# Altium PCB CustomTP4056Module.PcbDoc
Units mm, origin at the board's own origin, x right, y up, seen from the top; angles counter-clockwise.
Board outline 40.01 x 26.67 mm, 2 copper layers (Top Layer, Bottom Layer); 13 components, 10 nets, 36 pads, 0 vias.
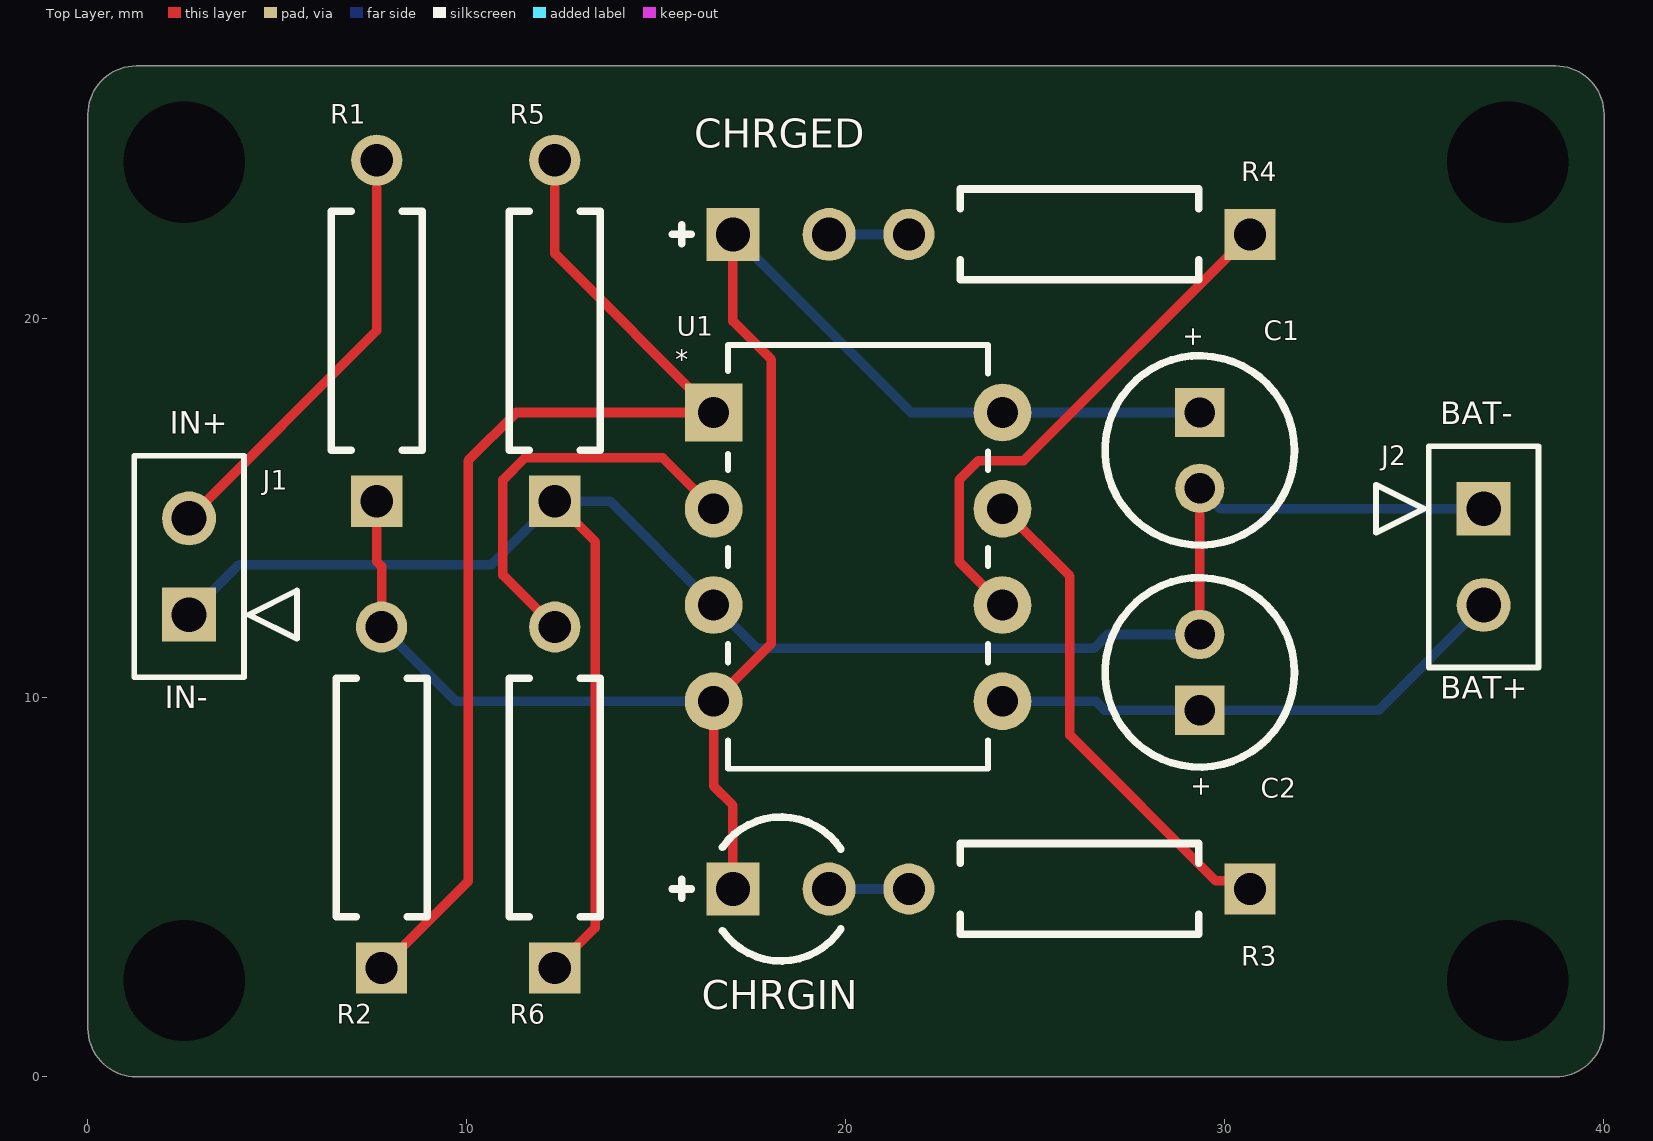
[diagram p0: Top Layer view]
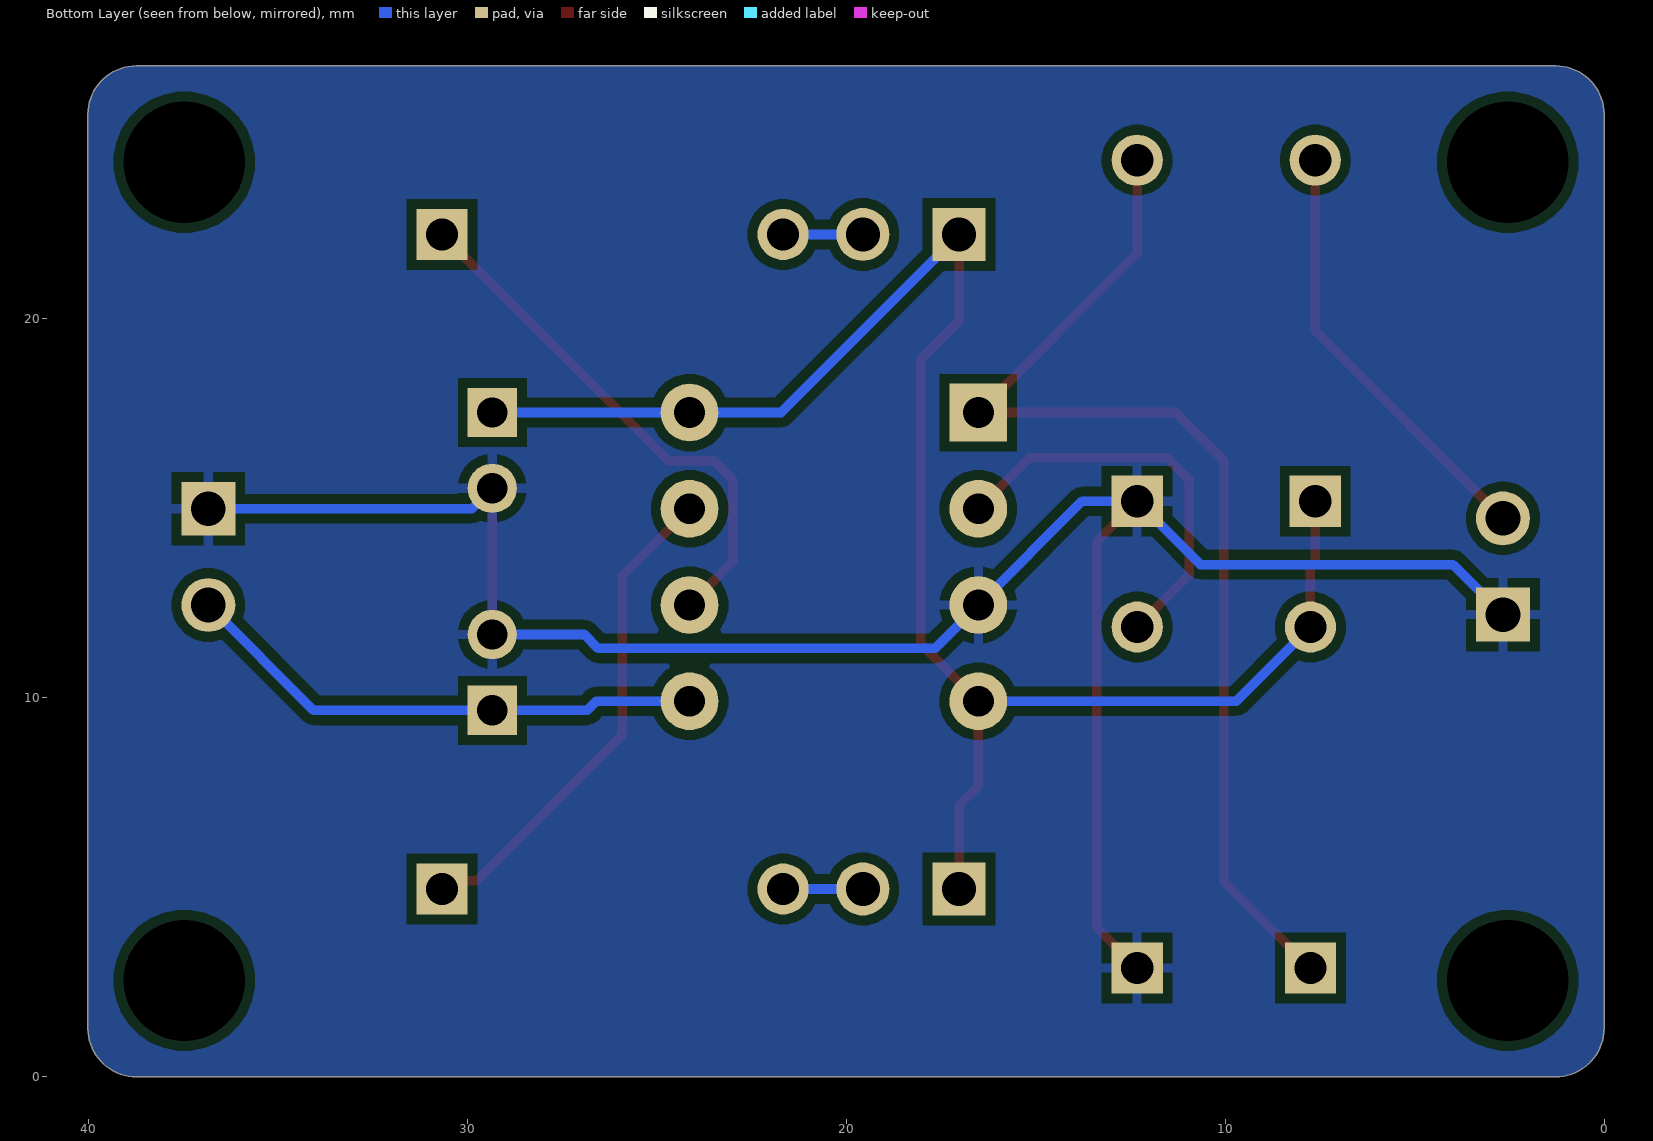
[diagram p1: Bottom Layer view, seen from below]

## Layer stack, top to bottom
Top Solder: solder mask 0.0102, Solder Resist, Dk 3.5
Top Layer: signal copper 0.0356
Dielectric 1: dielectric 0.32, FR-4, Dk 4.8
Bottom Layer: signal copper 0.0356
Bottom Solder: solder mask 0.0102, Solder Resist, Dk 3.5

## Board outline
0,1.27 0,25.4 cw(c1.27,25.4) 1.27,26.67 38.735,26.67 cw(c38.735,25.4) 40.005,25.4 40.005,1.27 cw(c38.735,1.27) 38.735,0 1.27,0 cw(c1.27,1.27)

## Design rules (kind name [scope] priority, off if disabled: settings)
Clearance [All] p1: gap=0.254 ignorepadtopadclearanceinfootprint=FALSE
PolygonConnect [All] p1: connectstyle=Relief reliefconductorwidth=0.254 reliefentries=4 polygonreliefangle="90 Angle" airgapwidth=0.254
RoutingVias [All] p1: holewidth=0.711 width=1.27 viastyle="Through Hole" minholewidth=0.711 minwidth=1.27 maxholewidth=0.711 maxwidth=1.27
SolderMaskExpansion [All] p1: expansion=0.102 istentingtop=FALSE
Width [All] p1: maxlimit=0.254 minlimit=0.254 preferedwidth=0.254
30 further rules are at their usual default settings.

## Components (designator, comment, footprint, x,y, rotation, side; value= is the part's Value field where it differs from the comment)
C1 "ECA1HM100" CAPPR55-200-1100X500X1200 29.337,16.526 r270 top value=10µF
C2 "ECA1HM100" CAPPR55-200-1100X500X1200 29.337,10.668 r90 top value=10µF
CHRGED "LTL-1CHG" LTST-LTL-1CHG-2 18.288,22.225 r0 top (schematic designator DS2)
CHRGIN "LTL-1CHE" INDPR60-254-520X380X650 18.288,4.953 r0 top (schematic designator DS1)
J1 "Connector" CONN_M20-99902_HRW 2.667,12.192 r270 top
J2 "Connector" CONN_M20-99902_HRW 36.83,14.986 r90 top
R1 "MFR-25FBF52-475R" RESA60-630X240 7.62,19.685 r90 top value=220
R2 "MFR-25FBF52-475R" RESA60-630X240 7.747,7.366 r90 top value=220
R3 "MFR-25FBF52-475R" RESA60-630X240 26.162,4.953 r180 top value=220
R4 "MFR-25FBF52-475R" RESA60-630X240 26.162,22.225 r180 top value=220
R5 "MFR-25FBF52-475R" RESA60-630X240 12.319,19.685 r90 top value=220
R6 "MFR-25FBF52-475R" RESA60-630X240 12.319,7.366 r90 top value=220
U1 "TP4056_IC" DIP-8_STM 16.51,17.526 r0 top

## Footprints (in the part's own frame and the unit in brackets; to place one, negate y for a bottom-side part, rotate by r counter-clockwise, add the part's x,y. Pads: shape width x height; smd on the part's side, far side on the other; paste and mask are expansions set on the pad)
CAPPR55-200-1100X500X1200 [mm] "THD, 2-Leads, Dia 5mm, Pin Spacing 2mm"
  rect 1.3x1.3 hole 0.8: 1(-1,0)
  round 1.3 hole 0.8: 2(1,0)
  silkscreen extent -2.5,-2.5 2.5,2.5, body extent -2.5,-2.5 2.45,2.5, height 12
CONN_M20-99902_HRW [mil]
  rect 56x56 / inner round 60 / far side rect 56x56 hole 36 paste-99999 mask+0: 1(0,0)
  round 56 / inner round 60 / far side round 56 hole 36 paste-99999 mask+0: 2(-100,0)
  silkscreen extent -165,-57 65,112, body extent -150,-492 50,13, height 100
DIP-8_STM [mil]
  rect 60x60 / inner round 60 / far side rect 60x60 hole 32 paste-99999 mask+0: 1(0,0)
  round 60 hole 32 paste-99999 mask+0: 2(0,-100) 3(0,-200) 4(0,-300) 5(300,-300) 6(300,-200) 7(300,-100) 8(300,0)
  silkscreen extent 15,-370 285,70, body extent -5,-365 315,65, height 205
INDPR60-254-520X380X650 [mm] "THD, 2-Leads, Dia 3.8mm, Pitch 2.54mm"
  rect 1.4x1.4 hole 0.9: 1(-1.27,0)
  round 1.4 hole 0.9: 2(1.27,0)
  silkscreen extent -2.87,-1.9 1.58,1.9, body extent -1.9,-1.9 1.9,1.9, height 6.5
LTST-LTL-1CHG-2 [mm] "TH, 2-Leads, Dia 3.8mm"
  rect 1.4x1.4 hole 0.9: 1(-1.27,0)
  round 1.4 hole 0.9: 2(1.27,0)
  silkscreen extent -2.87,-0.25 -2.37,0.25, body extent -1.9,-1.9 1.9,1.9, height 6.5
RESA60-630X240 [mm] "Axial Resistor, 2-Leads, Dia 2.4mm, Body Length 6.3mm"
  rect 1.35x1.35 hole 0.85: 1(-4.5,0)
  round 1.35 hole 0.85: 2(4.5,0)
  silkscreen extent -3.15,-1.2 3.15,1.2, body extent -4.77,-1.19 4.77,1.2, height 2.4

## Part data
C1 C2: library part CMP-001-00025-7, "Aluminum Electrolytic Capacitor, 10 uF, +/- 20%, 50 V, -40 to 85 degC, 2-Pin THD, RoHS, Bulk", Capacitor Type=Electrolytic, Case/Package=Radial, Manufacturer=Panasonic, Max Operating Temperature=85°C, Min Operating Temperature=-40°C, Package Description="2-Pin Radial Lead, Dia 5 mm, Height 12 mm", Package Quantity=200, Package Reference=CAPPR55-200-1100X500X1200, Ripple Current=65mA, Tolerance=20%, Voltage Rating=50V, Datasheet URL=https://industrial.panasonic.com/cdbs/www-data/pdf/RDF0000/ABA0000C1218.pdf, Datasheet Version="Rev. 05, 10/2016", Diameter=5mm, Lead Pitch=2mm, Manufacturer URL=http://www.panasonic.com/, Mounting Technology=TH, Packaging=Bulk, Pins=2, Ripple Current (AC)=65mA, RoHS Compliant=True
CHRGED: library part CMP-007-00019-2, "LED Uni-Color Green, 100 mW, 30 mA, -55 to 100 degC, 2-Pin THD, RoHS, Bulk", Case/Package=Radial, Colour=Green, Forward Current=30mA, Forward Voltage=2.6V, Manufacturer=Lite-On, Max Operating Temperature=100°C, Min Operating Temperature=-55°C, Package Description="2-Pin Through Hole Device, Dia 3.8 mm", Package Quantity=1000, Power=100mW, Datasheet URL=http://datasheet.octopart.com/LTL-1CHG-Lite-On-datasheet-143841.pdf, Datasheet Version=Mar-00, Illumination Colour=Green, Lens Style=Dome, Luminous Intensity=12.6mcd, Manufacturer URL=http://www.us.liteon.com/, Mounting Technology=TH, Nominal Vf=2.1V, Package Reference=LTL-1CHG, Packaging=Bulk, Pins=2, RoHS Compliant=True, Viewing Angle=60degrees
CHRGIN: library part CMP-007-00018-2, "LED Uni-Color Red, 100 mW, 30 mA, -55 to 100 degC, 2-Pin THD, RoHS, Bulk", Case/Package=Radial, Colour=Red, Forward Current=20mA, Forward Voltage=2V, Manufacturer=Lite-On, Max Operating Temperature=100°C, Min Operating Temperature=-55°C, Package Description="2-Pin Through Hole Device, Dia 3.8 mm, Pitch 2.54 mm", Package Quantity=1000, Datasheet URL=https://datasheet.ciiva.com/15117/getdatasheetpartid-187746-15117985.pdf, Datasheet Version=Dec-03, Illumination Colour=Red, Lens Style=Dome, Luminous Intensity=12.6mcd, Manufacturer URL=http://www.us.liteon.com/, Mounting Technology=TH, Nominal Vf=2V, Package Reference=LTL-1CHE, Packaging=Bulk, Pins=2, RoHS Compliant=True, Viewing Angle=60degrees
J1 J2: library part M20-9990245, "No Description Available", Mfr_Name=Harwin, RefDes=RefDes, Type=Type
R1 R2 R3 R4 R5 R6: library part CMP-009-00056-4, "Axial Resistor, 220 Ohm, +/- 1%, 0.25 W, -55 to 155 degC, 2-Pin THD, RoHS, Bulk", Case/Package=Axial, Manufacturer=Yageo, Max Operating Temperature=155°C, Min Operating Temperature=-55°C, Package Description="2-Pin Axial Lead, Dia 2.4 mm, Body Length 6.3 mm", Package Quantity=200, Package Reference=MFR-25, Power=250mW, Tolerance=1%, Voltage Rating=250V, Datasheet URL=http://www.yageo.com/documents/recent/Yageo%20LR_MFR_2013.pdf, Datasheet Version=Apr-13, Manufacturer URL=http://www.yageo.com/, Mounting Technology=TH, Packaging=Bulk, RoHS Compliant=True
U1: library part NE555N, "No Description Available", Mfr_Name=STMicroelectronics, RefDes=RefDes, Type=Type

## Free pads (board coordinates)
  round 3 hole 3.2: ""(2.54,2.54) ""(2.54,24.13) ""(37.465,2.54) ""(37.465,24.13)

## Nets (pads, with @x,y where several pads share a name; then routed paths per layer and width w, separated by ;. In a path a pad name is that pad's centre, name@x,y a point inside that pad or via, vN(x,y) a via of type N, cw(c..) or ccw(c..) an arc to the next point about the centre after c; other vN are vias at no path point)
BAT+: C2.1 J2.2 U1.5 | length 13.9
  Bottom Layer w0.254: U1.5 26.594,9.906 26.832,9.668 C2.1 34.052,9.668 J2.2
GND: C1.2 C2.2 J1.1 J2.1 R5.1 R6.1 U1.3 | length 54.4
  Top Layer w0.254: R6.1 13.386,3.933 13.386,14.118 R5.1 ; C2.2 C1.2
  Bottom Layer w0.254: J1.1 3.988,13.513 10.647,13.513 R5.1 13.771,15.185 U1.3 17.653,11.303 26.543,11.303 26.908,11.668 C2.2 ; C1.2 29.877,14.986 J2.1
IN+: J1.2 R1.2 | length 11.5
  Top Layer w0.254: J1.2 7.62,19.685 R1.2
NetC1_1: C1.1 CHRGED.1 CHRGIN.1 R1.1 R2.2 U1.4 U1.8 | length 45.7
  Top Layer w0.254: R1.1 7.62,13.589 7.747,13.462 R2.2 ; CHRGIN.1 17.018,7.163 16.51,7.671 U1.4 18.034,11.43 18.034,18.923 17.018,19.939 CHRGED.1
  Bottom Layer w0.254: R2.2 9.707,9.906 U1.4 ; CHRGED.1 21.717,17.526 U1.8 C1.1
NetDS1_2: CHRGIN.2 R3.2 | length 2.1
  Bottom Layer w0.254: CHRGIN.2 R3.2
NetDS2_2: CHRGED.2 R4.2 | length 2.1
  Bottom Layer w0.254: CHRGED.2 R4.2
NetR2_1: R2.1 R5.2 U1.1 | length 29.7
  Top Layer w0.254: R2.1 10.033,5.152 10.033,16.256 11.303,17.526 U1.1 12.319,21.717 R5.2
NetR3_1: R3.1 U1.7 | length 13.1
  Top Layer w0.254: U1.7 25.908,13.208 25.908,9.017 29.755,5.17 30.445,5.17 R3.1
NetR4_1: R4.1 U1.6 | length 14.1
  Top Layer w0.254: U1.6 22.987,13.589 22.987,15.748 23.495,16.256 24.693,16.256 R4.1
NetR6_2: R6.2 U1.2 | length 10.8
  Top Layer w0.254: R6.2 10.947,13.238 10.947,15.748 11.532,16.332 15.164,16.332 U1.2

## Polygon pours and split planes (outlines as drawn)
GND on Bottom Layer "GND_Pour" (solid, pour order 0): 1.27,26.67 38.735,26.67 cw(c38.735,25.444) 39.602,26.311 39.646,26.267 cw(c38.779,25.4) 40.005,25.4 40.002,25.397 cw(c38.803,1.255) 39.65,0.407 39.602,0.359 cw(c38.735,1.226) 38.735,0 1.27,0 cw(c1.27,1.226) 0.403,0.359 0.359,0.403 cw(c1.226,1.27) 0,1.27 0,25.4 cw(c1.226,25.4) 0.359,26.267 0.403,26.311 cw(c1.27,25.444)

## Silkscreen, mask and mechanical layers (free items; w line width, h text height)
Top Overlay:
  text "BAT-" at 35.687,17.018 h1.02
  text "IN+" at 2.159,16.764 h1.02
  text "BAT+" at 35.687,9.779 h1.02
  text "IN-" at 2.032,9.525 h1.02
Mechanical 1:
  the board outline again, w0.254

## Text inside footprints (layer, text, board x,y; h text height)
C1: Top Overlay "+" at 28.956,19.812 h0.51 r270
C2: Top Overlay "+" at 29.591,7.366 h0.51 r90
U1: Top Overlay "*" at 15.494,18.669 h0.51; Mechanical 13 "*" at 16.954,16.891 h1.27